# EAGLE board source_eagle (EAGLE 9.6.2)
REV: A
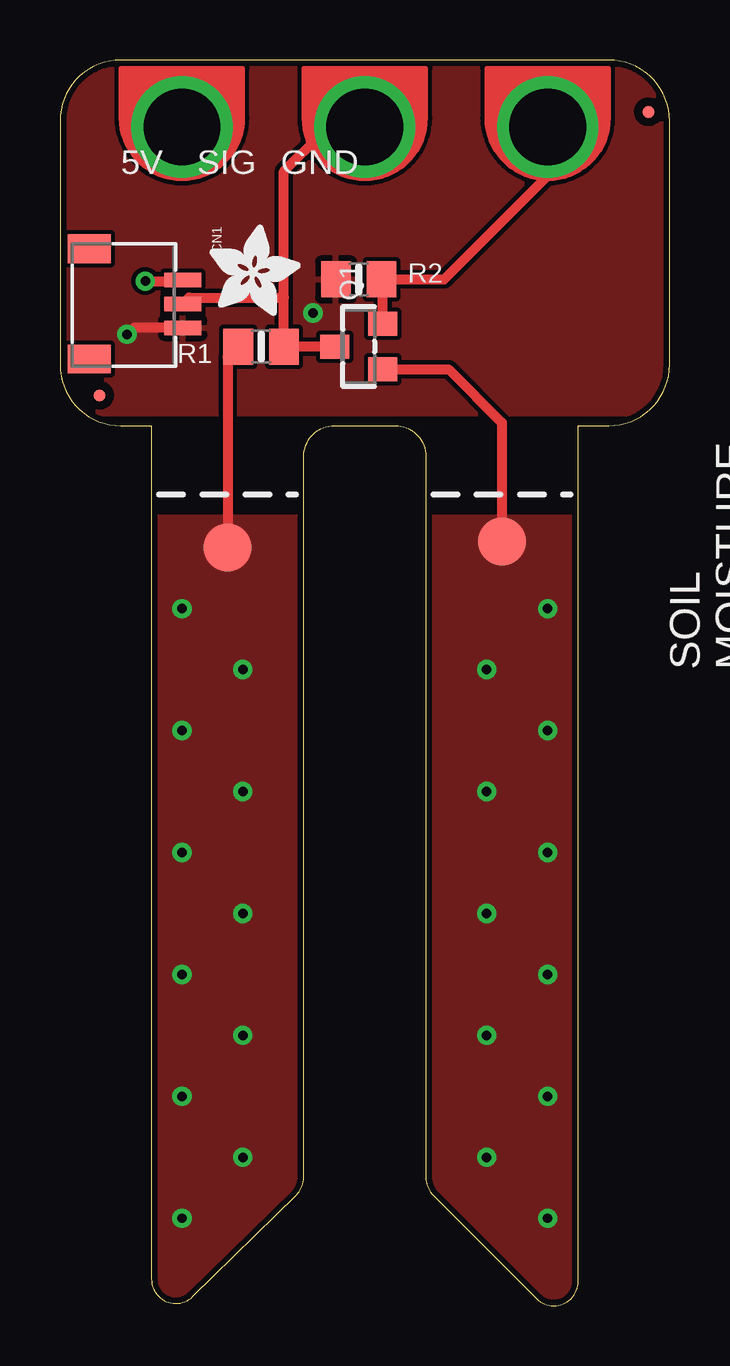
[diagram p0: board, top side]
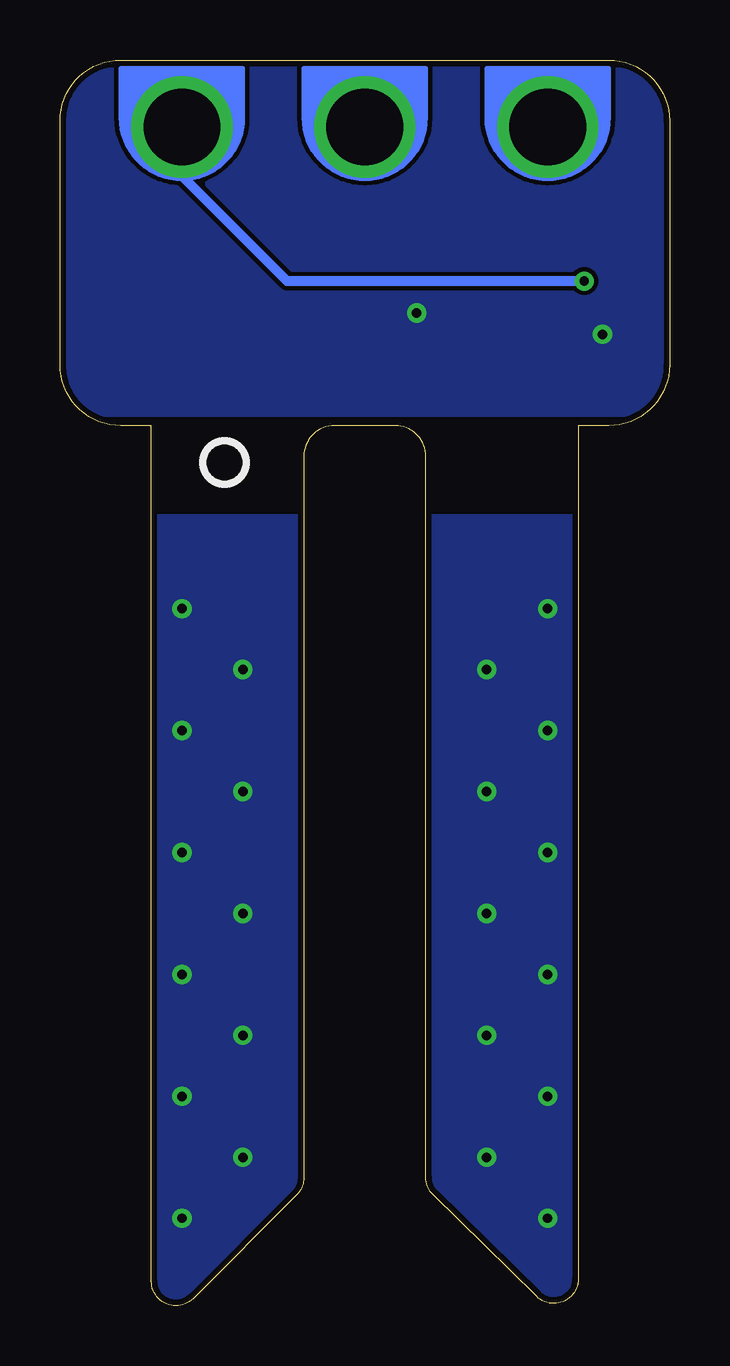
[diagram p1: board, bottom side, seen from below]

Size 25.4 x 51.9 mm. Coordinates in mm from the lower left corner, seen from the top.
Outline: 15.24,35.39 15.24,5.33 arc45 15.54,4.62 19.86,0.3 arc135 21.59,1.02 21.59,36.66 22.86,36.66 arc90 25.4,39.2 25.4,49.36 arc90 22.86,51.9 2.54,51.9 arc90 0,49.36 0,39.2 arc90 2.54,36.66 3.81,36.66 3.81,1.11 arc134 5.54,0.38 9.86,4.61 arc46 10.16,5.34 10.16,35.39 arc-90 11.43,36.66 13.97,36.66 arc-90 15.24,35.39
Copper layers (1*16): Top 0.035mm / dielectric 1.5mm / Bottom 0.035mm
Design rules "adafruit 7-7": minimum track width 7mil, minimum drill 15.5mil, track to track 7mil, track to pad 7mil, pad to pad 7mil, via to via 7mil, smd to smd 7mil, copper to edge 10mil, drill to drill 8mil, minimum pad ring 10mil, minimum via ring 8mil, stop-mask expansion 2mil, vias tented up to drill 20mil, thermal gap 10mil

## Footprints (pad centres in the part's own frame; a part is rotated, then mirrored left to right if it is on the bottom)
JST_SH3 = smd 0.6 x 1.55: 1 -1,2.006; 2 0,2.006; 3 1,2.006 | smd 1.2 x 1.8: MT1 -2.3,-1.894; MT2 2.3,-1.894
SOT23-WIDE = smd 1 x 1.2: 1 -0.95,-1; 2 0.95,-1; 3 0,1
0805-NO = smd 1.24 x 1.5: 1 -0.95,0; 2 0.95,0
TESTPOINT_ROUND_2MM_NO = smd 2 x 2: P$1 0,0
PCB_ALLI = drill 3.2: P$1 0,0.508
FIDUCIAL_0.5MM = smd 0.5 x 0.5: 1 0,0

## Placement (x,y rotation side)
CN1  JST_SH3  [JST_SH3]  3.11,41.74 270 top
PLABEL0  [PLABEL0]  6.86,35.39 0 top
PLABEL1  [PLABEL1]  5.08,45.81 0 top
PLABEL2  [PLABEL2]  12.83,45.68 0 top
PLABEL3  [PLABEL3]  20.57,45.68 0 top
PLABEL4  [PLABEL4]  14.61,40.73 0 top
PLABEL5  [PLABEL5]  18.41,35.39 0 top
PLABEL6  [PLABEL6]  12.7,46.06 0 bottom
PLABEL7  [PLABEL7]  19.94,38.44 0 top
Q1  MMBT3904  [SOT23-WIDE]  12.45,39.97 90 top
R1  100  [0805-NO]  8.38,39.97 180 top
R2  10K  [0805-NO]  12.45,42.76 0 top
SOIL1  [TESTPOINT_ROUND_2MM_NO]  6.99,31.58 90 top
SOIL2  [TESTPOINT_ROUND_2MM_NO]  18.41,31.84 90 top
TP1  SEWTAPPCB_ALLIGATOR  [PCB_ALLI]  12.7,48.6 0 top
TP2  SEWTAPPCB_ALLIGATOR  [PCB_ALLI]  20.32,48.6 0 top
TP3  SEWTAPPCB_ALLIGATOR  [PCB_ALLI]  5.08,48.6 0 top
U$1  [ADAFRUIT_3.5MM]  6.22,41.24 0 top
U$2  FIDUCIAL_0.5MM  [FIDUCIAL_0.5MM]  1.65,37.93 0 top
U$3  FIDUCIAL_0.5MM  [FIDUCIAL_0.5MM]  24.51,49.74 0 top
U$5  [PCBFEAT-REV-040]  18.54,35.14 0 bottom

## Library data of the parts
CN1 TP1-TP3 = adafruit_electromech
PLABEL0 PLABEL1-PLABEL7 = pinguin
Q1 R1 R2 SOIL1 SOIL2 U$1-U$3 U$5 = microbuilder

## Nets
GND: CN1.3 R2.1 TP3.P$1
SIGNAL: CN1.1 Q1.2 R2.2 TP2.P$1
SOIL1: R1.2 SOIL1.P$1
SOIL2: Q1.1 SOIL2.P$1
V+: CN1.2 Q1.3 R1.1 TP1.P$1

## Tracks (layer width: path | path; a pad name or v marks a point on that pad's centre or on a via)
GND  (via drill 0.39)
  Top 0.406: CN1.3 3.06,40.74 v2.79,40.47
  Bottom 0.406: 5.08,47.08 TP3.P$1
  other vias: 10.54,41.36
  pour Bottom: 25.4,51.9 25.4,37.17 0,37.17 0,51.9
  pour Top: 0,51.9 25.4,51.9 25.4,37.17 0,37.17
SIGNAL  (via drill 0.39)
  Top 0.406: Q1.2 13.45,42.71 R2.2 16,42.76 20.32,47.08 TP2.P$1 | v3.56,42.69 5.06,42.69 CN1.1
  Bottom 0.406: v3.56,42.69 15.93,42.69 20.32,47.08 TP2.P$1
SOIL1  (via drill 0.39)
  Top 0.406: R1.2 6.99,39.52 SOIL1.P$1
  other vias: 5.08,29.04 5.08,23.96 5.08,18.88 7.62,26.5 7.62,21.42 7.62,16.34 5.08,13.8 7.62,11.26 5.08,8.72 7.62,6.18 5.08,3.64
  pour Bottom (no thermals): 10.16,4.91 5.54,0.3 arc-135 3.81,1.02 3.81,32.85 10.16,32.85
  pour Top (no thermals): 10.16,4.91 5.54,0.3 arc-135 3.81,1.02 3.81,32.85 10.16,32.85
SOIL2  (via drill 0.39)
  Top 0.406: Q1.1 16.19,39.02 18.41,36.79 SOIL2.P$1
  other vias: 20.32,29.04 17.78,26.5 20.32,23.96 17.78,21.42 20.32,18.88 17.78,16.34 20.32,13.8 17.78,11.26 20.32,8.72 17.78,6.18 20.32,3.64
  pour Top (isolate 0.025, no thermals): 21.59,32.85 21.59,1.02 arc-135 19.86,0.3 15.24,4.91 15.24,32.85
  pour Bottom (no thermals): 21.59,32.85 21.59,1.02 arc-135 19.86,0.3 15.24,4.91 15.24,32.85
V+
  Top 0.406: Q1.3 R1.1 9.33,42 | 9.33,42 9.33,47.27 10.92,48.86 12.45,48.86 TP1.P$1 | CN1.2 5.37,42 9.33,42

## Text on the board
tNames: 5V | SIG | GND | SOIL | MOISTURE | SENSOR
Pinguin_tBackup: GND | 3V | OUT | Simple / Soil / Sensor | 🌱 | INSERT / TO LINE | INSERT / TO LINE
Pinguin_bBackup: Analog Out Resistive Sensor